# Altium PCB Mako DSP R2.0.PcbDoc (part 2 of 2)
Units mil, origin at the board's own origin, x right, y up, seen from the top; angles counter-clockwise.
Board outline 4440 x 2100 mil, 4 copper layers (Top Layer, GND, Power, Bottom Layer); 224 components, 235 nets, 988 pads, 314 vias.
Unrouted connection lines stored in the file: 159.
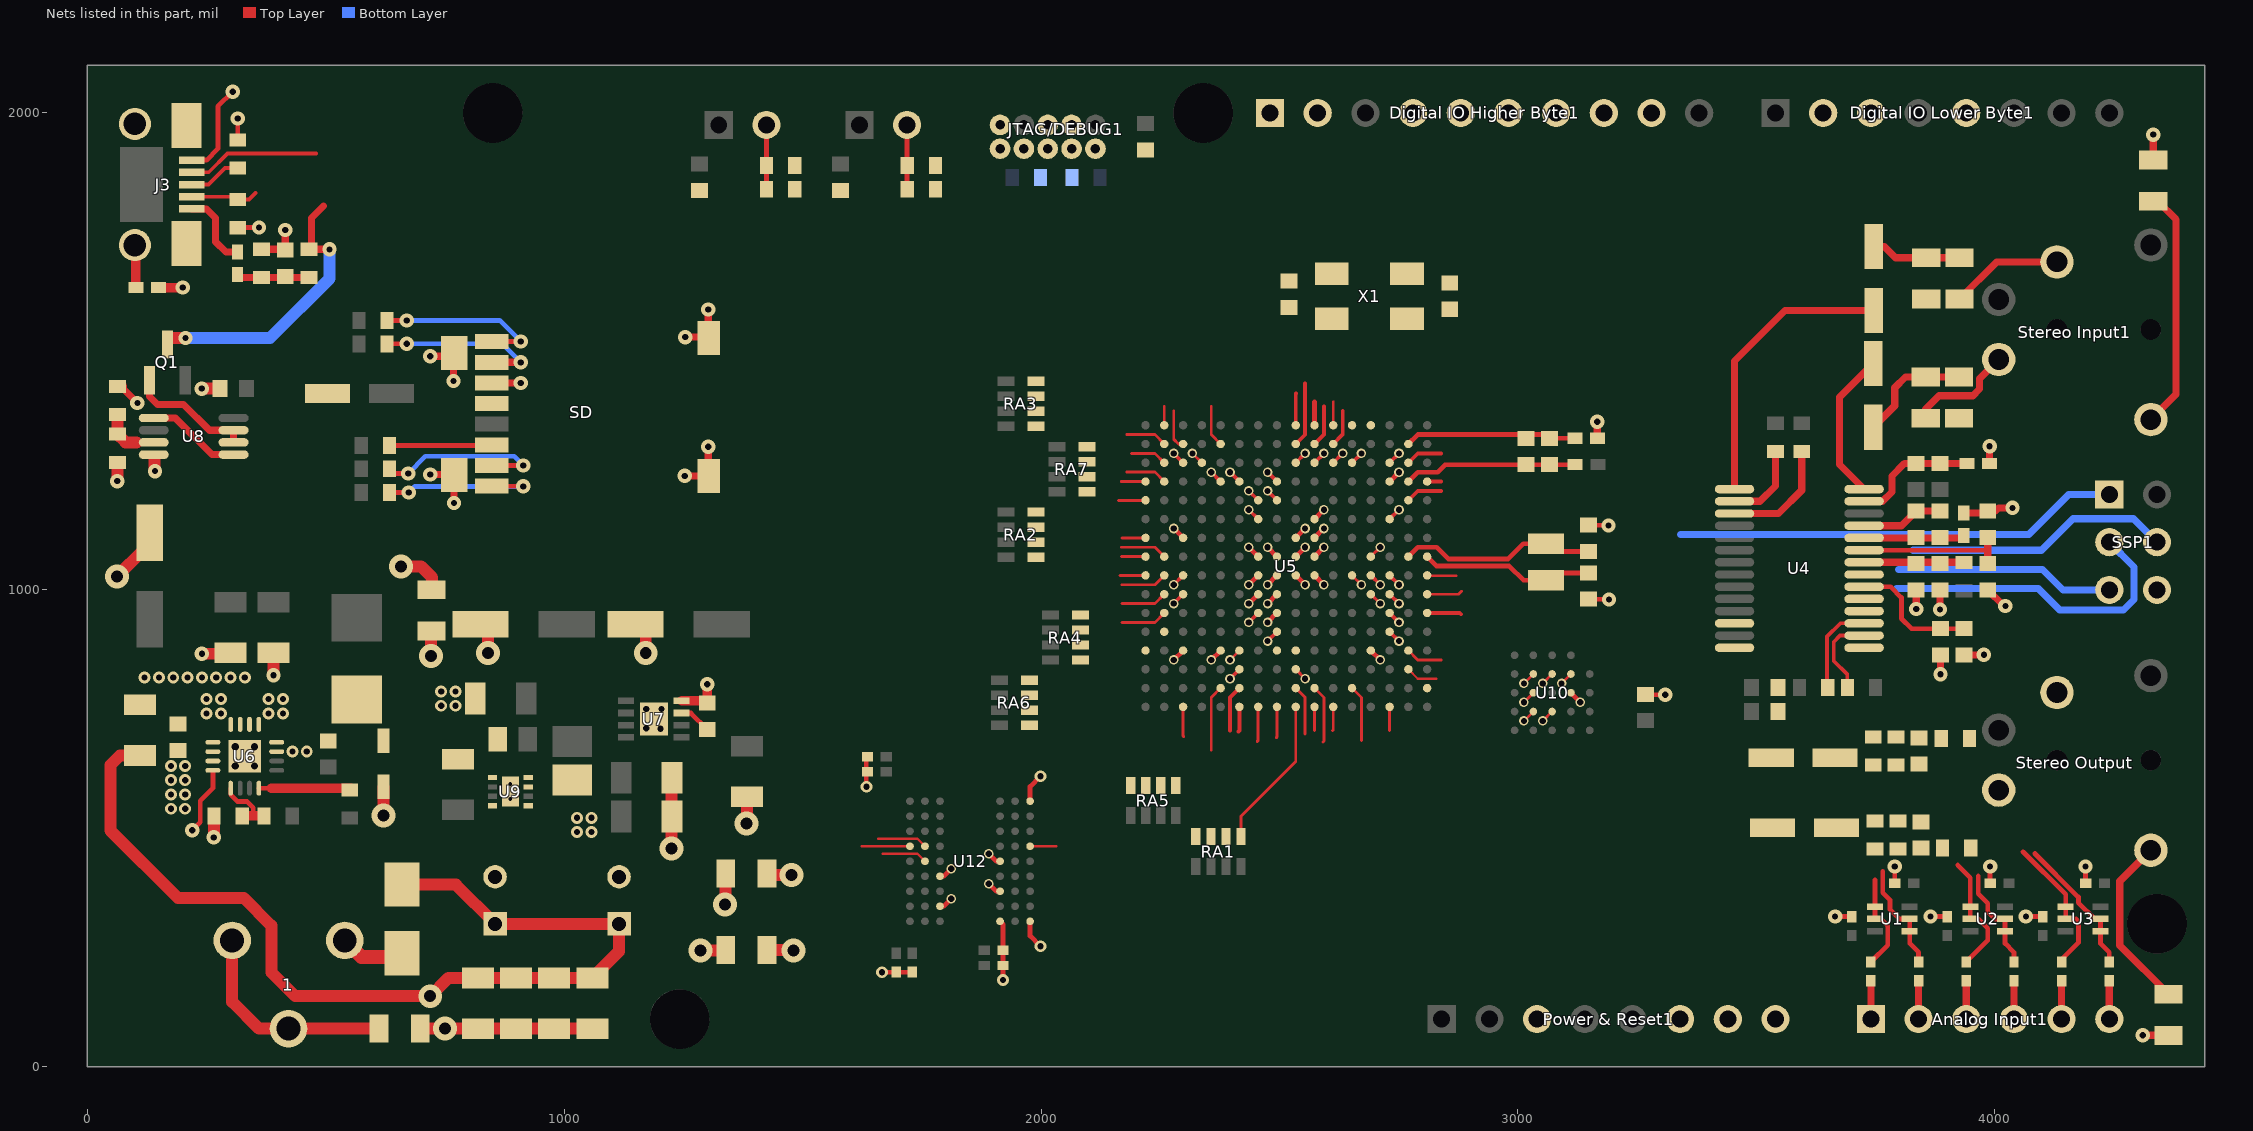
[diagram p4: the nets of this part, all layers, seen from the top]

## Via types
v1: diameter 20, hole 13, Top Layer to Bottom Layer, 165 vias
v2: diameter 30, hole 13, Top Layer to Bottom Layer, 70 vias
v3: diameter 25, hole 13, Top Layer to Bottom Layer, 48 vias
v4: diameter 50, hole 25, Top Layer to Bottom Layer, 20 vias
v5: diameter 19.68, hole 11.81, Top Layer to Bottom Layer, 5 vias
v6: diameter 25, hole 15, Top Layer to Bottom Layer, 4 vias
v7: diameter 19.68, hole 7.87, Top Layer to Bottom Layer, 2 vias

## Nets (pads, with @x,y where several pads share a name; then routed paths per layer and width w, separated by ;. In a path a pad name is that pad's centre, name@x,y a point inside that pad or via, vN(x,y) a via of type N, cw(c..) or ccw(c..) an arc to the next point about the centre after c; other vN are vias at no path point) (continued)
EMC_A0: RA1.1 U5.H16 | length 319.5
  Top Layer w6: RA1.1@2419.2,482.77 2419.2,525.2 2533.96,639.96 2533.96,680.31 U5.H16@2533.96,754.72
EMC_A1: RA1.2 U5.G16 | length 49.2
  Top Layer w6: 2573.33,705.51 U5.G16@2573.33,754.72
EMC_A2: RA1.3 U5.F16 | length 50.3
  Top Layer w6: 2611.28,705 2612.7,706.43 U5.F16@2612.7,754.72
EMC_A3: RA1.4 U5.E15 | length 117.7
  Top Layer w6: U5.E15@2652.07,794.09 2671.76,774.41 2671.76,684.52
EMC_A4: RA3.1 U5.C16 | length 49.2
  Top Layer w6: 2730.81,705.51 U5.C16@2730.81,754.72
EMC_A5: RA3.2 U5.P2 | length 82.8
  Top Layer w6: 2278.06,1374.8 2278.06,1315.75 2287.9,1305.91 U5.P2@2297.74,1305.91
EMC_A6: RA3.3 U5.R2 | length 86.9
  Top Layer w6: 2179.63,1325.59 2238.69,1325.59 U5.R2@2258.37,1305.91
EMC_A7: RA3.4 U5.R3 | length 77.1
  Top Layer w6: 2189.48,1286.22 2238.69,1286.22 U5.R3@2258.37,1266.54
EMC_A8: RA5.1 U5.J16 | length 65.3
  Top Layer w6: 2493.28,690 2494.59,691.32 U5.J16@2494.59,754.72
EMC_A9: RA5.2 U5.H14 | length 27.8
  Top Layer w6: U5.H14@2533.96,833.46 v1(2553.65,813.78)
EMC_A10: RA5.3 U5.K16 | length 74.5
  Top Layer w6: 2453.28,683 2453.28,682 2455.22,683.94 U5.K16@2455.22,754.72
EMC_A11: RA5.4 U5.M15 | length 137.8
  Top Layer w6: 2356.8,664.48 2356.8,774.41 U5.M15@2376.48,794.09
EMC_DQ0: RA2.8 U5.T5 | length 56.5
  Top Layer w6: 2162.48,1187.8 U5.T5@2219,1187.8
EMC_DQ1: RA2.6 U5.T7 | length 49.2
  Top Layer w6: 2169.79,1109.06 U5.T7@2219,1109.06
EMC_DQ2: RA2.5 U5.R8 | length 97.9
  Top Layer w6: 2168.65,1089.37 2238.69,1089.37 U5.R8@2258.37,1069.68
EMC_DQ3: RA2.7 U5.T9 | length 53.4
  Top Layer w6: 2165.59,1030.31 U5.T9@2219,1030.31
EMC_DQ4: RA4.8 U5.R9 | length 96.7
  Top Layer w6: 2169.79,1010.63 2238.69,1010.63 U5.R9@2258.37,1030.31
EMC_DQ5: RA4.6 U5.R10 | length 96.7
  Top Layer w6: 2169.79,971.26 2238.69,971.26 U5.R10@2258.37,990.94
EMC_DQ6: RA4.5 U5.R11 | length 96.7
  Top Layer w6: 2169.79,931.89 2238.69,931.89 U5.R11@2258.37,951.57
EMC_DQ7: RA4.7 U5.P9 | length 27.8
  Top Layer w8: v1(2278.06,1010.63) U5.P9@2297.74,1030.32
EMC_DQ8: RA6.8 U5.P10 | length 27.8
  Top Layer w8: v1(2278.06,971.26) U5.P10@2297.74,990.94
EMC_DQ9: RA6.6 U5.T13
EMC_DQ10: RA6.5 U5.R12
EMC_DQ11: RA6.7 U5.N3 | length 27.8
  Top Layer w6: v1(2317.43,1286.22) U5.N3@2337.11,1266.54
EMC_DQ12: RA7.8 U5.P3 | length 27.8
  Top Layer w8: v1(2278.06,1286.22) U5.P3@2297.74,1266.54
EMC_DQ13: RA7.6 U5.R4 | length 86.9
  Top Layer w6: 2179.63,1246.85 2238.69,1246.85 U5.R4@2258.37,1227.17
EMC_DQ14: RA7.5 U5.T8 | length 50
  Top Layer w6: 2168.96,1069.68 U5.T8@2219,1069.68
EMC_DQ15: RA7.7 U5.R1 | length 39.4
  Top Layer w6: U5.R1@2258.37,1345.28 2258.37,1384.65
FB: R9.1 R11.2 U6.5 | length 134.9
  Top Layer w10: U6.5@300.72,584.07 300.72,570.41 315.13,556 335.25,556 347.98,543.26 347.98,526
  Top Layer w20: R11.2@325.25,526 R9.1@370.72,526
GND: "Digital IO Higher Byte1.4" "Power & Reset1.6" "Power & Reset1.7" "USER STATUS.1" C1.1 C2.1 C3.1 C4.1 C5.1 C6.1 C7.1 C8.1 C9.1 C12.1 C13.1 C16.1 C17.1 C18.1 C19.1 C21.1 C23.1 C24.1 C25.1 C27.1 C28.1 C29.1 C30.2 C31.1 C32.2 C35.1 C36.1 C37.1 C38.1 C39.1 C40.1 C41.1 C42.1 C43.1 C44.1 C45.1 C46.1 C47.1 C48.1 C49.1 C50.1 C51.2 C52.2 C53.2 C54.1 C55.1 C56.2 C57.2 C58.2 C59.1 C60.1 C61.2 C62.1 C63.1 C64.2 C65.2 C66.1 C67.1 C68.1 C71.1 C72.1 C73.1 C74.1 C75.1 C78.1 C79.1 C80.1 C81.1 C82.1 C83.1 C84.1 C85.1 C86.1 C87.1 C88.1 C89.1 C90.1 C91.1 C92.1 C93.1 C94.1 C95.1 C96.1 C97.1 D1.1 FB3.2 FB4.2 FB6.1 FB8.1 FB8.2 FB9.1 FB9.2 FB11.1 FB11.2 FB12.2 FB13.2 FB14.2 FB15.2 FB16.1 FB17.2 J3.5 JTAG/DEBUG1.3 JTAG/DEBUG1.5 JTAG/DEBUG1.9 R8.1 R11.1 R14.1 R16.1 R20.1 R29.2 R31.2 R32.2 R33.2 R43.1 R44.1 R45.1 R47.1 R51.1 R52.2 R57.1 RESET1.2 SD.6 SD.9 SD.10 SD.11 SD.12 SSP1.6 STATUS.1 U4.12 U4.21 U5.C4 U5.D13 U5.G6 U5.G7 U5.G8 U5.G9 U5.H7 U5.H8 U5.H9 U5.J8 U5.J9 U5.J10 U5.J11 U5.K8 U5.K9 U5.K10 U5.M13 U5.P7 U5.P13 U6.4 U6.14 U6.15 U6.17 U7.4 U7.9 U8.4 U9.1 U9.4 U9.5 U9.9 U10.B3 U11.9 U12.A1 U12.A3 U12.B7 U12.C3 U12.D7 U12.E3 U12.J1 X1.2 X1.4 | length 4715
  Top Layer w10: J3.5@219.04,1901.18 250.22,1901.18 274.04,1925 274.04,2013.78 v2(305,2044.74) ; v2(220.25,496) 237,512.75 237,557.75 263.32,584.07 U6.4@263.32,621.47 ; R32.2@315.57,1943.54 v2(315.57,1988.46) ; R33.2@315.83,1759.74 v2(360,1759.74) ; C68.1@413.03,1714.27 C68.1@415,1712.3 ; v3(1633.63,587.25) 1633.63,647.94 C90.1@1635.94,650.25 ; v3(1666.63,198.25) 1729.31,198.25 C88.1@1729.63,198.57 ; U12.B7@1788.01,336.51 1795.88,336.51 v1(1811.63,352.26) ; U12.D7@1788.01,399.5 1795.88,399.5 v1(1811.63,415.25) ; v1(1890.37,383.76) 1906.12,368.01 U12.C3@1913.99,368.01 ; v1(1890.37,446.75) 1906.12,431 U12.E3@1913.99,431 ; U12.A3@1913.99,305.02 1920.31,298.69 C92.1@1920.31,244.25 v3(1920.31,181.94) ; U12.A1@1976.98,305.02 1976.98,274.39 v3(1998.63,252.75) ; U12.J1@1976.98,556.98 1976.98,587.61 v3(1998.63,609.25) ; v1(2278.06,853.15) U5.P13@2297.74,872.83 ; v1(2278.06,1128.74) U5.P7@2297.74,1109.06 ; v1(2356.8,853.15) U5.M13@2376.48,872.83 ; v1(2435.54,971.26) U5.K10@2455.22,990.94 ; v1(2435.54,1010.63) U5.K9@2455.22,1030.31 ; v1(2435.54,1089.37) U5.K8@2455.22,1069.68 ; v1(2474.91,931.89) U5.J11@2494.59,951.57 ; v1(2474.91,971.26) U5.J10@2494.59,990.94 ; v1(2474.91,1010.63) U5.J9@2494.59,1030.31 ; v1(2474.91,1089.37) U5.J8@2494.59,1069.68 ; U5.H9@2533.96,1030.31 v1(2553.65,1010.63) ; U5.H8@2533.96,1069.68 v1(2553.65,1089.37) ; U5.H7@2533.96,1109.06 v1(2553.65,1128.74) ; U5.G9@2573.33,1030.31 v1(2593.02,1010.63) ; U5.G8@2573.33,1069.68 v1(2593.02,1089.37) ; U5.G7@2573.33,1109.06 v1(2593.02,1128.74) ; U5.G6@2573.33,1148.43 v1(2593.02,1168.11) ; U5.D13@2691.44,872.83 v1(2711.13,853.15) ; U5.C4@2730.81,1227.17 v1(2750.5,1246.85) ; U10.B3@3110.99,784.21 v1(3130.68,764.53) ; C35.1@3147.7,980.44 v2@3190.26,980.44 ; C36.1@3147.7,1135.56 v2@3189.14,1135.56 ; C63.1@3267.62,780.77 3268.18,780.21 v2(3308.62,780.21) ; v2(3665,315) 3699.69,315 C2.1@3700,314.69 ; v2(3790,420) 3790,385.32 C1.1@3790.32,385 ; v2(3865,315) 3899.69,315 C4.1@3900,314.69 ; v2(3990,420) 3990,385.32 C3.1@3990.32,385 ; v2(4065,315) 4099.69,315 C6.1@4100,314.69 ; v2(4190,420) 4190,385.32 C5.1@4190.32,385
  Top Layer w15: R29.2@365,1714.27 C68.1@413.03,1714.27 ; C68.1@415,1712.3 v2(415,1754.74) ; v2(719,1242) 768.58,1242 769,1241.58 v2(769,1182) ; v2(719,1490) SD.12@762.58,1490 ; FB11.1@721,912.69 FB11.1@722,913.69 ; v2(768,1438) 768,1495.42 SD.12@769.54,1496.95 ; SD.6@848.28,1433.96 v2(909,1434) v2(909,1434) ; v2(1253,1239) 1302.92,1239 SD.9@1303,1239.08 1302,1240.08 v2(1302,1300) ; v2(1254,1530) SD.10@1301.45,1530 ; SD.10@1302,1529.45 v2(1302,1588) ; FB6.1@3166.32,1318 v2(3166.32,1352.38) ; v2(3835,960) C12.1@3835,1000 ; v2(3885,959) C13.1@3885,1000 ; v2(3886,823) C18.1@3886,863.44 ; C19.1@3935,863.44 3976.44,863.44 v2(3977,864) ; FB17.2@3935,1161.18 C16.1@3981.06,1161.18 ; C17.1@3985,1000 4019,966 v2(4022,966) ; C16.1@3985,1165.12 4001.12,1165.12 4008,1172 v2(4037,1172) ; FB13.2@3989,1265.38 v2(3989,1301) ; v2(4310,66) FB15.2@4363.69,66 ; FB14.2@4332,1901.31 v2(4332,1954.62)
  Top Layer w20: FB12.2@149.2,1634.02 v2(200,1634.02) ; U7.4@1246.07,767.39 1295.17,767.39 C97.1@1300,762.56 v2(1300,802)
  Top Layer w25: v4(62,1028) 119,1085 C66.1@119,1119.55 ; v2(63,1228) R20.1@63,1267.47 ; v2@141,1249.94 U8.4@141,1278 ; v2(240,1422) C65.2@278.44,1422 ; v2(240.25,866) 298.4,866 C53.2@300.25,867.85 ; v2(265.25,481) 265.72,481.47 R11.1@265.72,526 ; v2(390.25,821) C50.1@390.25,867.85 ; v4(621,527) D1.1@621,586.77 ; v4(658,1049) 700,1049 723,1026 FB11.2@723,1006 ; FB16.1@698.31,80 v4(750,80) 750.15,79.85 C74.1@819,79.85 C7.1@899,79.85 C72.1@979,79.85 C73.1@1059,79.85 C73.1@1059.85,79 ; v4(721,861) FB11.1@721,912.69 ; C61.2@788,927 C61.2@817.45,927 ; C61.2@824.45,928 840,912.45 v4(840,868) ; v4(1171,868) C58.2@1171,912.45 ; v4(1225,458) 1225,604.85 C56.2@1226.15,606 ; v4(1286,244) FB8.2@1337.69,244 ; v4(1337,340) 1338.69,341.69 FB9.2@1338.69,405 ; v4(1382,510) 1383,511 C57.2@1383,565.85 ; FB8.1@1425.31,245 v4@1480,245 ; FB9.1@1425.31,405 1428.31,402 v4(1477,402)
  Bottom Layer w15: R52.2@4842.9,502 v2(4842.9,541.47) ; v2(4851.43,346.91) C78.1@4890.9,346.91 ; C75.1@5129.34,345.47 v2(5170.9,345.47) ; R31.2@5175.9,503 v2(5175.9,542.47)
  other v2: 3190.7,980 3189.7,1135 142,1249
  other v3: 1027,492 1057,492 1027,522 1057,522 1202,709 1172,710 1172,750 1204,750 742,757 772,757 742,787 772,787 120.25,816 150.25,816 180.25,816 210.25,816 240.25,816 270.25,816 300.25,816 330.25,816
  other v4: 1481,244
  other v5: 4995.12,404.94 5022.68,404.94 5008.9,434.47 4995.12,464 5022.68,464
  other v6: 310.25,631 350.25,631 310.25,671 350.25,671
  other v7: 887,561.25 887,592.75
I2C_CLK: R1.1 U4.17 U5.L15 | length 294.1
  Top Layer w8: 2396.28,705 2396.28,774.52 U5.L15@2415.85,794.09 ; R1.1@3649.69,795.16 3648,796.84 3648,902 3675.84,929.84 U4.17@3725.83,929.84
I2C_DATA: R2.1 U4.16 U5.L16 | length 229.4
  Top Layer w8: 2414.28,703 2415.85,704.57 U5.L16@2415.85,754.72 ; R2.1@3690.63,795.16 3690.63,822.37 3662,851 3662,891 3675.25,904.25 U4.16@3725.83,904.25
LATCH_ENABLE: U4.15 U5.L14 | length 27.8
  Top Layer w8: v1(2396.17,813.78) U5.L14@2415.85,833.46
LDQM: U5.G15 U12.E8 | length 217.3
  Top Layer w5: 1667.75,446.75 1740.76,446.75 U12.E8@1756.51,431
  Top Layer w6: U5.G15@2573.33,794.09 2593.02,774.41 2593.02,682.74 2591.28,681
MODE: U4.14 U5.L13 | length 27.8
  Top Layer w6: v1(2396.17,853.15) U5.L13@2415.85,872.83
Net1_1: 1.1 D2.2 | length 139.9
  Top Layer w8: D2.2@646.85,230 D2.2@660,243.15
  Top Layer w30: 1.1@540,265 575,230 D2.2@646.85,230
Net1_2: 1.2 1.3 FB16.2 | length 460
  Top Layer w25: 1.2@303.78,265 303.78,136.22 360.04,79.96 1.3@421.89,79.96 FB16.2@611.69,80 FB16.2@611.69,80
"NetAnalog Input1_1": "Analog Input1.1" R34.1 | length 80.3
  Top Layer w15: 3740,100 R34.1@3740,180.32
"NetAnalog Input1_2": "Analog Input1.2" R35.1 | length 80.3
  Top Layer w15: 3840,100 R35.1@3840,180.32
"NetAnalog Input1_3": "Analog Input1.3" R36.1 | length 80.3
  Top Layer w15: 3940,100 R36.1@3940,180.32
"NetAnalog Input1_4": "Analog Input1.4" R37.1 | length 80.3
  Top Layer w15: 4040,100 R37.1@4040,180.32
"NetAnalog Input1_5": "Analog Input1.5" R38.1 | length 80.3
  Top Layer w15: 4140,100 R38.1@4140,180.32
"NetAnalog Input1_6": "Analog Input1.6" R39.1 | length 80.3
  Top Layer w15: 4240,100 R39.1@4240,180.32
"NetAux GPIO 0_1": "Aux GPIO 0.1"
"NetAux GPIO 0_2": "Aux GPIO 0.2"
"NetAux GPIO 0_3": "Aux GPIO 0.3"
"NetAux GPIO 0_4": "Aux GPIO 0.4"
"NetAux GPIO 0_5": "Aux GPIO 0.5"
"NetAux GPIO 0_6": "Aux GPIO 0.6"
"NetAux GPIO 0_7": "Aux GPIO 0.7"
"NetAux GPIO 0_8": "Aux GPIO 0.8"
"NetAux GPIO 0_9": "Aux GPIO 0.9"
"NetAux GPIO 0_10": "Aux GPIO 0.10"
"NetAux GPIO 1_1": "Aux GPIO 1.1"
"NetAux GPIO 1_2": "Aux GPIO 1.2"
"NetAux GPIO 1_3": "Aux GPIO 1.3"
"NetAux GPIO 1_4": "Aux GPIO 1.4"
"NetAux GPIO 1_5": "Aux GPIO 1.5"
"NetAux GPIO 1_6": "Aux GPIO 1.6"
"NetAux GPIO 1_7": "Aux GPIO 1.7"
"NetAux GPIO 1_8": "Aux GPIO 1.8"
"NetAux GPIO 1_9": "Aux GPIO 1.9"
"NetAux GPIO 1_10": "Aux GPIO 1.10"
NetC10_1: C10.1 C11.1 FB13.1 U4.27 | length 268.3
  Top Layer w15: U4.27@3725.83,1185.75 3764.34,1185.75 3784,1205.41 3784,1239 3810.16,1265.16 FB13.1@3941.54,1265.16
NetC12_2: C12.2 C13.2 R3.1 U4.22 | length 209.5
  Top Layer w10: R3.1@3934.29,1057.8 R3.1@3935,1057.09
  Top Layer w15: U4.22@3725.83,1057.8 R3.1@3934.29,1057.8
NetC14_1: C14.1 C15.1 FB17.1 U4.24 | length 211.2
  Top Layer w10: FB17.1@3930.04,1108.98 FB17.1@3935,1113.94
  Top Layer w15: U4.24@3725.83,1108.98 FB17.1@3930.04,1108.98
NetC14_2: C14.2 C15.2 U4.25 | length 171.8
  Top Layer w15: U4.25@3725.83,1134.57 3804.45,1134.57 C14.2@3835,1165.12 C15.2@3885,1165.12
NetC16_2: C16.2 C17.2 U4.23 | length 314.2
  Top Layer w10: U4.23@3725.83,1083.39 3725.96,1083.25 3984.75,1083.25 3985,1083
  Top Layer w15: C17.2@3985,1055.12 3985,1083 C16.2@3985,1110
NetC18_2: C18.2 C19.2 U4.20 | length 271.4
  Top Layer w10: U4.20@3725.83,1006.61 3781.39,1006.61 3804,984 3804,940 3825.44,918.56 C18.2@3886,918.56 C19.2@3935,918.56
NetC20_1: C20.1 U4.1 | length 604.5
  Top Layer w15: U4.1@3454.17,1211.34 3454.17,1480.17 3560.07,1586.07 C20.1@3746,1586.07
NetC20_2: C20.2 C21.2 R4.1 | length 189.8
  Top Layer w15: C20.2@3746,1719.93 3768.07,1719.93 3791.69,1696.31 C21.2@3856,1696.31 R4.1@3926,1696.31
NetC22_1: C22.1 U4.28 | length 314.5
  Top Layer w15: U4.28@3725.83,1211.34 3674,1263.16 3674,1403.93 C22.1@3745,1474.93
NetC22_2: C22.2 C23.2 R5.1 | length 245.8
  Top Layer w15: C22.2@3745,1341.07 3790,1386.07 3790,1424 3812.31,1446.31 R5.1@3855,1446.31 C23.2@3925,1446.31
NetC24_2: C24.2 FB2.2 U5.F3 | length 27.8
  Top Layer w8: U5.F3@2612.7,1266.54 v1(2632.39,1286.22)
NetC25_2: C25.2 FB1.2 U5.G3 | length 27.8
  Top Layer w8: U5.G3@2573.33,1266.54 v1(2593.02,1286.22)
NetC30_1: C30.1 U5.E1 X1.3
NetC31_2: C31.2 U5.D1 X1.1
NetC68_2: C68.2 FB10.1 R27.1 R29.1 | length 152.4
  Top Layer w10: FB10.1@315,1661.12 FB10.1@320.91,1655.21
  Top Layer w15: FB10.1@320.91,1655.21 R29.1@365,1655.21 R27.1@465,1655.21
NetC69_1: C69.1 U4.19
NetC69_2: C69.2 R49.2 R51.2
NetC70_1: C70.1 R46.2 R48.1 U11.1 | length 125.2
  Bottom Layer w10: U11.1@5065,464 5099.43,464 5127.9,492.47 R46.2@5127.9,503
  Bottom Layer w15: R46.2@5127.9,503 R48.1@5127.9,542.94
NetC70_2: C70.2 R49.1 R50.2
NetC75_2: C75.2 R50.1 U11.3 | length 53.7
  Bottom Layer w10: U11.3@5065,424.63 5086.74,424.63 5109.34,402.03
NetC76_1: C76.1 U4.18
NetC76_2: C76.2 R55.2 R57.2
NetC77_1: C77.1 R53.2 R54.1 U11.7 | length 136.4
  Bottom Layer w10: R54.1@4890.9,542.94 R53.2@4890.9,503 4918.9,475 4918.9,457.47 4932.06,444.32 U11.7@4952.8,444.32
NetC77_2: C77.2 R55.1 R56.2
NetC78_2: C78.2 R56.1 U11.5 | length 59
  Bottom Layer w10: C78.2@4893.81,404.94 U11.5@4952.8,404.94
NetC97_2: C97.2 U7.3 | length 68.2
  Top Layer w10: U7.3@1246.07,741.8 1265.65,741.8 C97.2@1300,707.44
NetDBGEN1_2: DBGEN1.2 R15.2 R16.2 | length 134.5
  Top Layer w10: R15.2@1719,1840.47 DBGEN1.2@1719,1975
NetFB3_1: FB3.1 U5.G1 | length 49.2
  Top Layer w10: U5.G1@2573.33,1345.28 2573.33,1394.49
NetFB4_1: FB4.1 U5.H3 | length 27.8
  Top Layer w8: U5.H3@2533.96,1266.54 v1(2553.65,1286.22)
NetFB10_2: FB10.2 J3.1 | length 162.7
  Top Layer w15: J3.1@219.04,1798.82 250.22,1798.82 269.04,1780 269.04,1730 290.68,1708.36 FB10.2@315,1708.36
NetFB12_1: FB12.1 J3.6 J3.7 J3.8 J3.9 | length 89.8
  Top Layer w8: J3.7@99.94,1723.03 J3.7@101.95,1721.02
  Top Layer w20: FB12.1@101.95,1634.02 J3.7@101.95,1721.02
NetFB14_1: "Stereo Input1.5" FB14.1 | length 505.5
  Top Layer w8: FB14.1@4332,1814.69 FB14.1@4342.31,1814.69
  Top Layer w15: 4327,1357.02 4380,1410.02 4380,1777 FB14.1@4342.31,1814.69
NetFB15_1: "Stereo Output.5" FB15.1 | length 370.9
  Top Layer w15: 4327,454.02 4262,389.02 4262,254.31 FB15.1@4364,152.31
NetJ3_4: J3.4 U5.H2 | length 411.7
  Top Layer w8: J3.4@219.04,1875.59 254.63,1875.59 294.04,1915 479.29,1915 ; U5.H2@2533.96,1305.91 2553.28,1325.22 2553.28,1433
NetL3_1: L3.1 U9.7
NetQ1_1: Q1.1 U8.6 U8.7 | length 265.1
  Top Layer w15: Q1.1@130.6,1439.6 130.6,1405.4 147,1389 202,1389 256.2,1334.8 U8.7@306.66,1334.8 U8.6@306.66,1309.2
NetQ1_3: Q1.3 R27.2 U5.F1 | length 643.2
  Top Layer w6: U5.F1@2612.7,1345.28 2612.7,1394.49
  Top Layer w15: R27.2@465,1714.27 R27.2@470,1714.27 ; 495,1805 470,1780 R27.2@470,1714.27 ; v2(508,1714) 507.73,1714.27 R27.2@470,1714.27
  Top Layer w25: Q1.3@171,1528 v2(206,1528)
  Bottom Layer w25: v2(206,1528) 383,1528 508,1653 v2(508,1714)
NetR4_2: "Stereo Input1.4" R4.2 | length 236.5
  Top Layer w15: R4.2@3926,1609.69 4004.04,1687.73 4130.15,1687.73
NetR5_2: "Stereo Input1.1" R5.2 | length 228.3
  Top Layer w15: R5.2@3855,1359.69 3855,1379 3883,1407 3954,1407 3968.03,1421.03 3968.03,1442.93 4008.1,1483.01
NetR6_2: R6.2 U4.2 U5.J13 | length 171.7
  Top Layer w15: U4.2@3454.17,1185.75 3507.75,1185.75 3540,1218 R6.2@3540,1290.47
NetR7_2: R7.2 U4.3 U5.H13 | length 242.5
  Top Layer w15: U4.3@3454.17,1160.16 3546.16,1160.16 3595,1209 R7.2@3595,1290.47
NetR8_2: R8.2 U5.H1 | length 66.9
  Top Layer w8: U5.H1@2533.96,1345.28 2533.96,1411.69 2534.28,1412
NetR13_2: R13.2 R14.2 TRST1.2 | length 135.2
  Top Layer w10: TRST1.2@1424,1975 1424,1840.47 R13.2@1424.47,1840
NetR15_1: R15.1 U5.L4 | length 27.8
  Top Layer w8: v1(2396.17,1246.85) U5.L4@2415.85,1227.17
NetR19_1: R19.1 R20.2 U8.3 | length 88.1
  Top Layer w25: R19.1@63,1367.47 R20.2@63,1326.53 80.32,1309.2 103,1309.2
NetR21_1: R21.1 U9.8
NetR22_1: R22.1 R43.2
NetR23_2: R23.2 STATUS.3
NetR24_1: R24.1 STATUS.4
NetR25_2: R25.2 STATUS.2
NetR26_2: "USER STATUS.3" R26.2
NetR28_1: "USER STATUS.4" R28.1
NetR30_2: "USER STATUS.2" R30.2
NetR31_1: R31.1 R46.1 U11.2 | length 111.1
  Bottom Layer w10: U11.2@5065,444.32 R46.1@5127.53,444.32
  Bottom Layer w15: R46.1@5127.53,444.32 R46.1@5127.9,443.94 R31.1@5175.9,443.94
NetR34_2: R34.2 U1.1 U1.2 U5.B3 | length 281.8
  Top Layer w8: U5.B3@2770.18,1266.54 2789.87,1286.22 2839.08,1286.22
  Top Layer w10: R34.2@3740,219.69 3775.32,255 3775.32,295.76 3761.07,310 U1.2@3748.58,310 U1.1@3748.58,335.59 3748.58,391.42
NetR35_2: R35.2 U1.4 U1.5 U5.A4 | length 263.5
  Top Layer w8: U5.A4@2809.55,1227.17 2839.08,1227.17
  Top Layer w10: 3765,410 3765,365 3780,350 3780,330 3800,310 U1.5@3821.42,310 U1.4@3821.42,284.41 3821.42,258.58 3840,240 R35.2@3840,219.69
NetR36_2: R36.2 U2.1 U2.2 U5.C3 | length 285.5
  Top Layer w8: U5.C3@2730.81,1266.54 v1(2750.5,1286.22) ; R36.2@3940,219.69 R36.2@3940,220
  Top Layer w10: 3922,423 3948.58,396.42 U2.1@3948.58,335.59 U2.2@3948.58,310 3965,310 3985,290 3985,265 R36.2@3940,220
NetR37_2: R37.2 U2.4 U2.5 U5.C6 | length 251.8
  Top Layer w8: U5.C6@2730.81,1148.43 v1(2750.5,1168.11)
  Top Layer w10: 3965,400 3965,362.8 3985,342.8 3985,325 4000,310 U2.5@4021.42,310 U2.4@4021.42,284.41 4021.42,258.58 4040,240 R37.2@4040,219.69
NetR38_2: R38.2 U3.1 U3.2 U5.E3 | length 334.5
  Top Layer w8: U5.E3@2652.07,1266.54 v1(2671.76,1286.22)
  Top Layer w10: 4059,451 4148.58,361.42 U3.1@4148.58,335.59 U3.2@4148.58,310 4170,310 4175.32,304.69 4175.32,260.32 4140,225 R38.2@4140,219.69
NetR39_2: R39.2 U3.4 U3.5 U5.B5 | length 376.3
  Top Layer w8: U5.B5@2770.18,1187.8 2789.87,1207.48 2839.08,1207.48
  Top Layer w10: 4084,447.21 4175.32,355.9 4175.32,343.93 4209.24,310 U3.5@4221.42,310 U3.4@4221.42,284.41 4221.42,258.58 4240,240 R39.2@4240,219.69
NetR40_1: R40.1 R44.2
NetR41_1: R41.1 R45.2
NetR42_1: R42.1 R47.2
NetR48_2: "Stereo Output.1" R48.2
NetR52_1: R52.1 R53.1 U11.6 | length 118.3
  Bottom Layer w10: R52.1@4842.9,442.94 4843.9,443.94 R53.1@4890.9,443.94 4900.43,443.94 4919.74,424.63 U11.6@4952.8,424.63
NetR54_2: "Stereo Output.4" R54.2
NetR58_1: R58.1 SD.1 | length 351.8
  Top Layer w10: R58.1@633.53,1204 v2(674,1204) ; SD.1@848.28,1217.43 913.57,1217.43 v2(914,1217)
  Bottom Layer w10: v2(674,1204) 687,1217 v2(914,1217)
NetR59_1: R59.1 SD.2 | length 377.6
  Top Layer w10: R59.1@633.53,1254 633.53,1246.47 636,1244 v2(673,1244) ; SD.2@848.28,1260.73 913.73,1260.73 v2(914,1261)
  Bottom Layer w10: v2(673,1244) 709,1280 895,1280 v2(914,1261)
NetR62_1: R62.1 SD.8 | length 359.6
  Top Layer w10: R62.1@628.53,1565 v2(670,1565) ; SD.8@848.28,1520.57 908.57,1520.57 v2(909,1521)
  Bottom Layer w10: v2(670,1565) 865,1565 v2(909,1521)
NetRTCALARM1_1: RTCALARM1.1 U5.A11 | length 71.8
  Top Layer w8: U5.A11@2809.55,951.57 2877.7,951.57 2880.28,949
NetU5_A9: U5.A9 WAKEUP0.1 | length 60.6
  Top Layer w6: U5.A9@2809.55,1030.31 2810.37,1029.5 2869.78,1029.5
NetU5_A10: U5.A10 WAKEUP1.1 | length 74.2
  Top Layer w6: U5.A10@2809.55,990.94 2875.22,990.94 2881.28,997
NetU5_A15: U5.A15 U10.D4 | length 27.8
  Top Layer w6: v1(3012.57,725.16) U10.D4@3032.25,744.84
NetU5_B13: U5.B13 U10.D2 | length 104.9
  Top Layer w6: U5.B13@2770.18,872.83 2789.87,853.15 2839.08,853.15 ; v1(3012.57,803.9) U10.D2@3032.25,823.58
NetU5_B14: U5.B14 U10.B2 | length 95
  Top Layer w5: U5.B14@2770.18,833.46 2789.87,813.78 2829.24,813.78 ; v1(3091.31,803.9) U10.B2@3110.99,823.58
NetU5_C9: U5.C9 WAKEUP2.1 | length 27.8
  Top Layer w8: U5.C9@2730.81,1030.32 v1(2750.5,1010.63)
NetU5_C10: U5.C10 U10.C2 | length 55.7
  Top Layer w6: v1(3051.94,803.9) U10.C2@3071.62,823.58
  Top Layer w8: U5.C10@2730.81,990.94 v1(2750.5,971.26)
NetU5_C11: U5.C11 U10.D3 | length 55.7
  Top Layer w6: v1(3012.57,764.53) U10.D3@3032.25,784.21
  Top Layer w8: U5.C11@2730.81,951.57 v1(2750.5,931.89)
NetU5_C12: U5.C12 U10.C4 | length 55.7
  Top Layer w6: v1(3051.94,725.16) U10.C4@3071.62,744.84
  Top Layer w8: U5.C12@2730.81,912.2 v1(2750.5,892.52)
NetU5_D8: U5.D8 WAKEUP3.1 | length 27.8
  Top Layer w6: U5.D8@2691.44,1069.68 v1(2711.13,1089.37)
NetU8_1: U8.1 U8.5 | length 199.1
  Top Layer w15: U8.1@139.34,1360.39 184.61,1360.39 261.39,1283.61 U8.5@306.66,1283.61
PG: R10.2 U6.8 | length 194
  Top Layer w10: U6.8@359.77,584.07 385.25,584.07
  Top Layer w20: 385.25,584.07 R10.2@553.79,584.07
PWM_3: "Digital IO Lower Byte1.5"
PWM_5: "Digital IO Lower Byte1.3"
PWM_6: "Digital IO Lower Byte1.2"
PWM_9: "Digital IO Higher Byte1.9"
PWM_10: "Digital IO Higher Byte1.8"
PWM_11: "Digital IO Higher Byte1.7"
PWM_12: "Digital IO Higher Byte1.6"
PWM_13: "Digital IO Higher Byte1.5"
RAS#: U5.P16 U12.F8 | length 168.2
  Top Layer w5: 1658.24,478.24 1740.76,478.24 U12.F8@1756.51,462.5
  Top Layer w6: U5.P16@2297.74,754.72 2297.74,693.54 2299.28,692
RESET: "Power & Reset1.3" C29.2 JTAG/DEBUG1.10 R12.1 RESET1.1 U5.D9 | length 27.8
  Top Layer w8: U5.D9@2691.44,1030.31 v1(2711.13,1010.63)
RTCX1: C35.2 U5.A8 X2.1 | length 342.4
  Top Layer w10: U5.A8@2809.55,1069.68 2829.24,1050 2981.7,1050 3011.7,1020 X2.1@3058.7,1020 ; X2.1@3075.03,1035.56 C35.2@3147.7,1035.56
RTCX2: C36.2 U5.B8 X2.2 | length 392.6
  Top Layer w10: U5.B8@2770.18,1069.68 2789.87,1089.37 2829.24,1089.37 2853.61,1065 2979.7,1065 3011.47,1096.77 X2.2@3058.7,1096.77 ; X2.2@3075.03,1080.44 C36.2@3147.7,1080.44
SHIELD_SCL: "Digital IO Higher Byte1.1" U5.K11 | length 27.8
  Top Layer w8: v1(2435.54,931.89) U5.K11@2455.22,951.57
SHIELD_SDA: "Digital IO Higher Byte1.2" U5.J12 | length 27.8
  Top Layer w8: v1(2474.91,892.52) U5.J12@2494.59,912.2
SSP_CS: SSP1.5 U5.E9 | length 487.6
  Top Layer w6: U5.E9@2652.07,1030.31 v1(2671.76,1010.63)
  Bottom Layer w15: 3798,1043 4100,1043 4143,1000 SSP1.5@4240,1000
SSP_MISO: R61.1 SD.7 SSP1.1 | length 1291.3
  Top Layer w10: R61.1@628.53,1516 v2(670,1516)
  Top Layer w15: SD.7@848.28,1477.27 908.73,1477.27 v2(909,1477)
  Bottom Layer w10: v2(670,1516) 870,1516 v2(909,1477)
  Bottom Layer w15: 3341,1116 4071,1116 4155,1200 SSP1.1@4240,1200
SSP_MOSI: R60.1 SD.3 SSP1.4 U5.M2 | length 860.7
  Top Layer w6: 2356.8,1384.65 2356.8,1325.59 U5.M2@2376.48,1305.91
  Top Layer w10: R60.1@633.53,1303 SD.3@847.24,1303
  Top Layer w15: SD.3@847.24,1303 SD.3@848.28,1304.04
  Bottom Layer w15: 3829,1083 4098,1083 4164,1149 4291,1149 SSP1.4@4340,1100
SSP_SCK: SD.5 SSP1.3 U5.D10 | length 695.2
  Top Layer w6: U5.D10@2691.44,990.94 v1(2711.13,971.26)
  Bottom Layer w15: 3794,1003 4091,1003 4136.03,957.97 4269.97,957.97 4292,980 4292,1048 SSP1.3@4240,1100
STATUS_BLUE: R24.2
STATUS_GREEN: R23.1
STATUS_RED: R25.1
SW: C26.1 D1.2 L1.1 U6.1 U6.12 U6.13 U6.16
  other v3: 250.25,741 280.25,741 380.25,741 410.25,741 250.25,771 280.25,771 380.25,771 410.25,771
TCK/SWDCLK: JTAG/DEBUG1.4 R18.1 U5.J5 | length 27.8
  Top Layer w8: v1(2474.91,1207.48) U5.J5@2494.59,1187.8
TDI: JTAG/DEBUG1.8 U5.J4 | length 27.8
  Top Layer w8: v1(2474.91,1246.85) U5.J4@2494.59,1227.17
TDO/SWO: JTAG/DEBUG1.6 R17.1 U5.K5 | length 27.8
  Top Layer w8: v1(2435.54,1207.48) U5.K5@2455.22,1187.8
TMS/SWDIO: JTAG/DEBUG1.2 U5.K6 | length 27.8
  Top Layer w8: v1(2435.54,1168.11) U5.K6@2455.22,1148.43
TRST: R13.1 U5.M4 | length 27.8
  Top Layer w8: v1(2356.8,1246.85) U5.M4@2376.48,1227.17
UDQM: U5.H15 U12.F1 | length 159.2
  Top Layer w5: U12.F1@1976.98,462.5 2032.1,462.5
  Top Layer w6: U5.H15@2533.96,794.09 2553.28,774.78 2553.28,698
USB0_N: J3.2 R33.1 U5.G2 | length 228.4
  Top Layer w8: J3.2@219.04,1824.41 309.71,1824.41 R33.1@315.58,1818.54 339.04,1818.54 352.5,1832 ; U5.G2@2573.33,1305.91 2593.02,1325.59 2593.02,1384.65
USB0_P: J3.3 R32.1 U5.F2 | length 187.9
  Top Layer w8: J3.3@219.04,1850 254.04,1850 288.53,1884.49 R32.1@315.57,1884.49 ; U5.F2@2612.7,1305.91 2632.39,1325.59 2632.39,1374.8
USER_STATUS_BLUE: R28.2
USER_STATUS_GREEN: R26.1
USER_STATUS_RED: R30.1
VDDA: C33.2 C34.2 FB5.2 U5.B4 | length 363.9
  Top Layer w10: U5.B4@2770.18,1227.17 2789.87,1246.85 2831.55,1246.85 2847.14,1262.44 C34.2@3016.7,1262.44 C33.2@3065.7,1262.44 FB5.2@3119.51,1262.44
VIN: "Power & Reset1.8" C7.2 C51.1 C52.1 C54.2 C55.2 C72.2 C73.2 C74.2 D2.1 R19.2 U6.2 U6.3 U6.11 | length 2117
  Top Layer w15: R19.2@70.47,1426.53 v2(105,1392)
  Top Layer w25: R19.2@63,1426.53 R19.2@70.47,1426.53 ; C55.2@110.25,652.85 68.85,652.85 48.5,632.5 48.5,495.5 190,354 328,354 386,296 386,198 436,148 v4(719,148) 757.15,186.15 C74.2@819,186.15 C7.2@899,186.15 C72.2@979,186.15 C73.2@1059,186.15 1115,242.15 C51.1@1115,299.79 C52.1@855,299.79 772.94,381.85 D2.1@660,381.85
  other v3: 175.25,541 205.25,541 175.25,571 205.25,571 175.25,601 205.25,601 175.25,631 205.25,631 430.25,660.84 460.25,661
VSSA: C33.1 C34.1 FB6.2 U5.B2 | length 349.2
  Top Layer w6: C33.1@3065.7,1317.56 C33.1@3066.14,1318
  Top Layer w10: U5.B2@2770.18,1305.91 2789.87,1325.59 C33.1@3057.66,1325.59 ; C33.1@3066.14,1318 FB6.2@3119.07,1318
WE#: U5.T4 U12.F9 | length 152.4
  Top Layer w5: 1623.5,462.5 U12.F9@1725.02,462.5
  Top Layer w6: 2168.11,1227.17 U5.T4@2219,1227.17
pads on no net: "Power & Reset1.1" "Stereo Input1.3" "Stereo Input1.6" "Stereo Input1." "Stereo Output.3" "Stereo Output.6" "Stereo Output." J3.GND JTAG/DEBUG1.1@2189.59,2006.5 JTAG/DEBUG1.7 U5.A1 U5.A2 U5.A3 U5.A5 U5.A6 U5.A7 U5.A12 U5.A13 U5.A14 U5.A16 U5.B1 U5.B6 U5.B7 U5.B9 U5.B11 U5.B12 U5.B15 U5.B16 U5.C1 U5.C2 U5.C5 U5.C7 U5.C8 U5.C13 U5.C15 U5.D2 U5.D3 U5.D4 U5.D5 U5.D6 U5.D11 U5.D12 U5.D15 U5.D16 U5.E2 U5.E4 U5.E5 U5.E6 U5.E7 U5.E8 U5.E10 U5.E11 U5.E13 U5.E14 U5.E16 U5.F4 U5.F5 U5.F6 U5.F12 U5.F14 U5.F15 U5.G4 U5.G5 U5.G12 U5.G13 U5.G14 U5.H5 U5.H6 U5.H11 U5.J1 U5.J2 U5.J3 U5.J14 U5.J15 U5.K1 U5.K2 U5.K3 U5.K4 U5.K12 U5.K13 U5.K14 U5.K15 U5.L1 U5.L2 U5.L3 U5.L5 U5.L6 U5.L11 U5.L12 U5.M1 U5.M3 U5.M5 U5.M6 U5.M7 U5.M8 U5.M9 U5.M10 U5.M12 U5.M14 U5.M16 U5.N1 U5.N2 U5.N4 U5.N5 U5.N6 U5.N9 U5.N10 U5.N12 U5.N14 U5.N15 U5.N16 U5.P1 U5.P4 U5.P5 U5.P6 U5.P8 U5.P11 U5.P12 U5.P14 U5.R6 U5.R7 U5.R13 U5.R14 U5.R15 U5.T1 U5.T2 U5.T3 U5.T6 U5.T11 U5.T12 U5.T14 U5.T15 U5.T16 U6.6 U6.7 U6.9 U7.2 U7.6 U7.7 U10.A2 U10.A3 U10.A4 U10.A5 U10.B1 U10.B5 U10.C1 U10.C3 U10.C5 U10.D1 U10.D5 U10.E1 U10.E2 U10.E3 U10.E4 U10.E5 U12.E2 U12.G1
copper on no net: | length 0
  other v1: 2278.06,813.78 2317.43,813.78 2356.8,813.78 2435.54,813.78 2474.91,813.78 2593.02,813.78 2632.39,813.78 2671.76,813.78 2435.54,853.15 2474.91,853.15 2553.65,853.15 2593.02,853.15 2671.76,853.15 2750.5,853.15 2278.06,892.52 2317.43,892.52 2356.8,892.52 2396.17,892.52 2435.54,892.52 2593.02,892.52 2632.39,892.52 2711.13,892.52 2278.06,931.89 2396.17,931.89 2553.65,931.89 2671.76,931.89 2711.13,931.89 2317.43,971.26 2356.8,971.26 2671.76,971.26 2317.43,1010.63 2356.8,1010.63 2278.06,1089.37 2356.8,1089.37 2671.76,1089.37 2750.5,1089.37 2356.8,1128.74 2671.76,1128.74 2750.5,1128.74 2278.06,1168.11 2317.43,1168.11 2356.8,1168.11 2396.17,1168.11 2553.65,1168.11 2632.39,1168.11 2671.76,1168.11 2711.13,1168.11 2278.06,1207.48 2317.43,1207.48 2356.8,1207.48 2396.17,1207.48 2553.65,1207.48 2593.02,1207.48 2632.39,1207.48 2671.76,1207.48 2711.13,1207.48 2750.5,1207.48 2278.06,1246.85 2317.43,1246.85 2435.54,1246.85 2593.02,1246.85 2632.39,1246.85 2671.76,1246.85 2711.13,1246.85 2356.8,1286.22 2396.17,1286.22 2435.54,1286.22 2474.91,1286.22 2711.13,1286.22

## Polygon pours and split planes (outlines as drawn)
AVDD on Top Layer "Mechanical 15-No Net" (solid, remove dead copper, pour order 27): 1220,705 1220,650 1367,650 1367,695 1340,695 1325,680 1271,680 1269,682 1269,705
SW on Top Layer "Mechanical 15-No Net" (solid, pour order 22): 355.25,676 355.25,736 365.25,736 365.25,791 510.25,791 510.25,821 620.25,821 620,713 651,713 651,652 621,652 621,666 480.25,666 480.25,686 420.25,686 420.25,676
DVDD on Top Layer "Power Plane-No Net" (solid, remove dead copper, pour order 31): 889,811 889,723 897,723 897,657 972,657 972,646 1063,646 1063,959 943,959 943,811
5VCC on Top Layer "Power Plane-No Net" (solid, remove dead copper, pour order 29): 739,569 739,500 831,500 831,563 862,563 862,594 819,594 819,576 812,569
GND on Top Layer "Top Layer-No Net" (solid, remove dead copper, pour order 30): 742,622 819,622 819,601 857.49,601 858,601.51 858,613 838,613 835,616 835,732 836,733 836,807 722,807 722,745 742,725
GND on Top Layer "Power Plane-No Net" (solid, remove dead copper, pour order 32): 858,613 858,556 838,556 838,474 1077,474 1077,542 910,542 910,613
NetL3_1 on Top Layer "Power Plane-No Net" (solid, remove dead copper, pour order 34): 1063,635 1063,552 947,552 947,572 907,572 907,600 948,600 948,635
NetR21_1 on Top Layer "Power Plane-No Net" (solid, remove dead copper, pour order 33): 897,722 832,722 832,627 867,627 867,597 942,597 942,657 897,657 897,722
5VCC on Top Layer "Mechanical 15-No Net" (solid, pour order 26): 262.75,1011 262.75,941 442.75,941 447.75,941 452.75,936 452.75,891 682.75,891 682.75,1011
VIN on Top Layer "Mechanical 15-No Net" (solid, remove dead copper, pour order 21): 375.25,671 375.25,651 410.25,651 410.25,641 475.25,641 475.25,681 410.25,681 410.25,671
GND on Top Layer "Mechanical 15-No Net" (solid, pour order 24): 315.25,691 345.25,691 345.25,831 70.25,831 70.25,736 160.25,736 160.25,701 225.25,701 225.25,796 315.25,796
SW on Top Layer "Mechanical 15-No Net" (solid, pour order 23): 230.25,676 295.25,676 295.25,691 305.25,691 305.25,791 230.25,791
VIN on Top Layer "Mechanical 15-No Net" (solid, pour order 20): 285.25,666 285.25,636 225.25,636 225.25,526 75.25,526 75.25,691 160.25,691 160.25,681 225.25,681 225.25,666
NetFB12_1 on Top Layer "Power Plane-No Net" (solid, remove dead copper, pour order 28): 59.04,1675 59.04,2025 244.04,2025 244.04,1675
5VCC on Top Layer "Mechanical 15-No Net" (solid, pour order 25): 1156,752 1156,806 1155,805 1084,804 1084,482 1151,482 1151,703 1109,703 1107,705 1107,749 1110,752
VIN on Bottom Layer "Mechanical 15-No Net" (solid, pour order 18): 160.25,649.21 220.25,649.21 220.25,601 410.25,601 410.25,676 475.25,676 475.25,526 160.25,526
SW on Bottom Layer "Mechanical 15-No Net" (solid, pour order 19): 430.25,711 230.25,711 230.25,791 430.25,791
GND on GND (split plane): 337.4,948.4 339.05,947.29 341,946.9 1289.89,946.9 1419.9,816.89 1419.9,20.1 20.1,20.1 20.1,1084.9 200.89,1084.9
GND on GND (split plane): 4419.9,20.1 1430.1,20.1 1430.1,819 1429.71,820.95 1428.6,822.6 1295.6,955.6 1293.95,956.71 1292,957.1 343.11,957.1 206.6,1093.6 204.95,1094.71 203,1095.1 20.1,1095.1 20.1,2079.9 3584.9,2079.9 3584.9,652.11 3491.4,558.6 3490.29,556.95 3489.9,555 3489.9,179 3490.29,177.05 3491.4,175.4 3493.05,174.29 3495,173.9 3496.95,174.29 3498.6,175.4 3499.71,177.05 3500.1,179 3500.1,552.89 3593.6,646.4 3594.71,648.05 3595.1,650 3595.1,2079.9 4419.9,2079.9
DVDD on Power (split plane): 2118.39,2004.98 2123.02,2003.86 2127.42,2002.04 2131.48,1999.55 2135.1,1996.46 2138.2,1992.84 2140.69,1988.78 2142.51,1984.38 2143.62,1979.75 2143.99,1975 2143.62,1970.25 2142.51,1965.62 2140.69,1961.22 2138.2,1957.16 2135.1,1953.54 2131.48,1950.45 2127.42,1947.96 2123.02,1946.14 2118.39,1945.02 2113.64,1944.65 2108.9,1945.02 2104.27,1946.14 2099.87,1947.96 2095.81,1950.45 2092.18,1953.54 2089.09,1957.16 2086.6,1961.22 2084.78,1965.62 2083.67,1970.25 2083.3,1975 2083.67,1979.75 2084.78,1984.38 2086.6,1988.78 2089.09,1992.84 2092.18,1996.46 2095.81,1999.55 2099.87,2002.04 2104.27,2003.86 2108.9,2004.98 2113.64,2005.35
no net on Power (split plane): 1149.9,264.1 1080.1,264.1 1080.1,333.9 1149.9,333.9
no net on Power (split plane): 971.2,564.85 975.5,563.82 979.59,562.13 983.36,559.82 986.73,556.94 989.6,553.58 991.91,549.8 993.61,545.71 994.64,541.41 994.99,537 994.64,532.59 993.61,528.29 991.91,524.2 989.6,520.42 986.73,517.06 983.36,514.18 979.59,511.87 975.5,510.18 971.2,509.15 966.79,508.8 962.37,509.15 958.07,510.18 953.98,511.87 950.21,514.18 946.84,517.06 943.97,520.42 941.66,524.2 939.96,528.29 938.93,532.59 938.58,537 938.93,541.41 939.96,545.71 941.66,549.8 943.97,553.58 946.84,556.94 950.21,559.82 953.98,562.13 958.07,563.82 962.37,564.85 966.79,565.2
AVDD on Power (split plane): 4419.9,20.1 1194.1,20.1 1194.1,365.9 1271,365.9 1272.95,366.29 1274.6,367.4 1275.71,369.05 1276.1,371 1276.1,717 1276.1,1030.9 1373.9,1030.9 1373.9,757 1373.9,312 1374.29,310.05 1375.4,308.4 1532.4,151.4 1534.05,150.29 1536,149.9 3295,149.9 3296.95,150.29 3298.6,151.4 3394.6,247.4 3458.6,311.4 3459.71,313.05 3460.1,315 3460.1,643.89 3594.6,778.4 3595.71,780.05 3596.1,782 3596.1,916 3596.1,1252.89 3628.6,1285.4 3629.71,1287.05 3630.1,1289 3630.1,1999.89 3710.11,2079.9 4419.9,2079.9
no net on Power (split plane): 3444.88,137.09 3449.68,136.13 3454.31,134.56 3458.7,132.39 3462.77,129.68 3466.45,126.45 3469.68,122.77 3472.4,118.7 3474.56,114.31 3476.13,109.68 3477.09,104.88 3477.41,100 3477.09,95.12 3476.13,90.32 3474.56,85.69 3472.4,81.3 3469.68,77.23 3466.45,73.55 3462.77,70.32 3458.7,67.61 3454.31,65.44 3449.68,63.87 3444.88,62.91 3440,62.59 3435.12,62.91 3430.32,63.87 3425.69,65.44 3421.3,67.61 3417.23,70.32 3413.55,73.55 3410.32,77.23 3407.6,81.3 3405.44,85.69 3403.87,90.32 3402.91,95.12 3402.59,100 3402.91,104.88 3403.87,109.68 3405.44,114.31 3407.6,118.7 3410.32,122.77 3413.55,126.45 3417.23,129.68 3421.3,132.39 3425.69,134.56 3430.32,136.13 3435.12,137.09 3440,137.41
no net on Power (split plane): 3344.96,137.67 3349.83,136.7 3354.54,135.1 3359,132.9 3363.13,130.14 3366.86,126.87 3370.14,123.13 3372.9,119 3375.1,114.54 3376.7,109.83 3377.67,104.96 3377.99,100 3377.67,95.04 3376.7,90.17 3375.1,85.46 3372.9,81 3370.14,76.87 3366.86,73.13 3363.13,69.86 3359,67.1 3354.54,64.9 3349.83,63.3 3344.96,62.33 3340,62.01 3335.04,62.33 3330.17,63.3 3325.46,64.9 3321,67.1 3316.87,69.86 3313.14,73.13 3309.86,76.87 3307.1,81 3304.9,85.46 3303.3,90.17 3302.33,95.04 3302.01,100 3302.33,104.96 3303.3,109.83 3304.9,114.54 3307.1,119 3309.86,123.13 3313.14,126.87 3316.87,130.14 3321,132.9 3325.46,135.1 3330.17,136.7 3335.04,137.67 3340,137.99
5VCC on Power (split plane): 426.9,940 427.29,938.05 428.4,936.4 729.9,634.89 729.9,376.1 20.1,376.1 20.1,1464.9 426.9,1464.9
no net on Power (split plane): 971.47,789.05 976.27,787.9 980.83,786.01 985.04,783.44 988.79,780.23 991.99,776.48 994.57,772.27 996.46,767.72 997.61,762.92 998,758 997.61,753.08 996.46,748.28 994.57,743.73 991.99,739.52 988.79,735.77 985.04,732.56 980.83,729.99 976.27,728.1 971.47,726.95 966.56,726.56 961.64,726.95 956.84,728.1 952.28,729.99 948.07,732.56 944.32,735.77 941.12,739.52 938.54,743.73 936.65,748.28 935.5,753.08 935.11,758 935.5,762.92 936.65,767.72 938.54,772.27 941.12,776.48 944.32,780.23 948.07,783.44 952.28,786.01 956.84,787.9 961.64,789.05 966.56,789.44
no net on Power (split plane): 504.45,549.33 508.75,548.29 512.84,546.6 516.61,544.29 519.97,541.41 522.85,538.05 525.16,534.28 526.85,530.19 527.89,525.88 528.23,521.47 527.89,517.06 526.85,512.76 525.16,508.67 522.85,504.9 519.97,501.53 516.61,498.66 512.84,496.34 508.75,494.65 504.45,493.62 500.03,493.27 495.62,493.62 491.32,494.65 487.23,496.34 483.46,498.66 480.09,501.53 477.22,504.9 474.91,508.67 473.21,512.76 472.18,517.06 471.83,521.47 472.18,525.88 473.21,530.19 474.91,534.28 477.22,538.05 480.09,541.41 483.46,544.29 487.23,546.6 491.32,548.29 495.62,549.33 500.03,549.67
DVDD on Power (split plane): 3621.4,2005.6 3620.29,2003.95 3619.9,2002 3619.9,1291.11 3587.4,1258.6 3586.29,1256.95 3585.9,1255 3585.9,916 3585.9,784.11 3451.4,649.6 3450.29,647.95 3449.9,646 3449.9,317.11 3387.4,254.6 3292.89,160.1 1538.11,160.1 1384.1,314.11 1384.1,757 1384.1,1036 1383.71,1037.95 1382.6,1039.6 1380.95,1040.71 1379,1041.1 1271,1041.1 1269.05,1040.71 1267.4,1039.6 1266.29,1037.95 1265.9,1036 1265.9,717 1265.9,376.1 740.1,376.1 740.1,637 739.71,638.95 738.6,640.6 437.1,942.11 437.1,1470 436.71,1471.95 435.6,1473.6 433.95,1474.71 432,1475.1 20.1,1475.1 20.1,2079.9 3695.69,2079.9
VIN on Power (split plane): 1183.9,20.1 20.1,20.1 20.1,365.9 1183.9,365.9
no net on Power (split plane): 889.9,264.1 820.1,264.1 820.1,333.9 889.9,333.9

## Keep-outs
Keep-Out Layer:
  lines w10: 25,25 25,2075 4415,2075 4415,1490 4415,25 4315,25 25,25

## Other copper
GND (plane layer: these items are gaps in the copper):
  lines w10: -10,1090 203,1090 341,952 1292,952 1425,819 1425,0 ; 3495,179 3495,555 3590,650 3590,2099
Power (plane layer: these items are gaps in the copper):
  circle w10: c3440,100 r42.43
  circle w10: c3340,100 r43.01
  circle w10: c2113.64,1975 r35.36
  circle w10: c966.79,537 r33.21
  circle w10: c966.56,758 r36.44
  circle w10: c500.03,521.47 r33.21
  lines w10: -5,371 1271,371 1271,717 1271,1036 1379,1036 1379,757 1379,312 1536,155 3295,155 3391,251 3455,315 3455,646 3591,782 3591,916 3591,1255 3625,1289 3625,2002 3718,2095 ; 5,1470 432,1470 432,940 735,637 735,372 ; 540,2100 940,2100 ; 1189,371 1189,0 1591,0 ; 815,259 815,339 895,339 895,259 815,259 ; 1075,259 1155,259 1155,339 1075,339 1075,259

## Silkscreen, mask and mechanical layers (free items; w line width, h text height)
Top Overlay:
  circle w5: c850,2000 r105
  circle w5: c1242,100 r105
  lines w10: 3909,2945 4494,2945
  text "Designed By" at 2869,4586 h75
  text "Mako DSP" at 2176,4557 h135
  text "Adam J. Vadala-Roth" at 2869,4526 h75
  text "Prototype R2.0:JAWS 1" at 2176,4507 h75
  text "www.MakoDSP.com" at 2869,4476 h75
  text "Analog Inputs" at 3904,2965 h78.74
Bottom Overlay:
  region: 2263 vertices and 0 holes, not listed, extent 657.18,88.57 1823,1139.99
  text "r" at 2180,560 h250
Mechanical 15:
  circle w5: c2340,2000 r62.5
  circle w5: c4340,300 r62.5
  lines w5: 0,0 4340,0 4440,0 4440,200 4440,2100 4280,2100 0,2100 0,0
Mechanical 16:
  lines w5: 0,125 ccw(c125,125) 125,0 ; 0,1975 cw(c125,1975) 125,2100

## Text inside footprints (layer, text, board x,y; h text height)
C51: Top Overlay "+" at 1205,279 h59.06 r90
C52: Top Overlay "+" at 945,279 h59.06 r90
"Digital IO Higher Byte1": Top Overlay "SCL" at 2505,1815 h78.74 r90; Top Overlay "SDA" at 2595,1810 h78.74 r90; Top Overlay "AREF" at 2700,1770 h78.74 r90; Top Overlay "GND" at 2805,1805 h78.74 r90; Top Overlay "~ 13" at 2905,1800 h78.74 r90; Top Overlay "12" at 3005,1855 h78.74 r90; Top Overlay "~ 11" at 3100,1795 h78.74 r90; Top Overlay "~ 10" at 3205,1795 h78.74 r90; Top Overlay "~ 9" at 3305,1835 h78.74 r90; Top Overlay "8" at 3405,1890 h78.74 r90
"Digital IO Lower Byte1": Top Overlay "7" at 3565,1895 h78.74 r90; Top Overlay "~ 6" at 3665,1835 h78.74 r90; Top Overlay "~ 5" at 3765,1835 h78.74 r90; Top Overlay "4" at 3865,1890 h78.74 r90; Top Overlay "~ 3" at 3965,1835 h78.74 r90; Top Overlay "2" at 4065,1890 h78.74 r90; Top Overlay "TX 1" at 4160,1790 h78.74 r90; Top Overlay "RX 0" at 4265,1785 h78.74 r90
"Power & Reset1": Top Overlay "IOREF" at 2965,170 h78.74 r90; Top Overlay "RESET" at 3060,170 h78.74 r90; Top Overlay "3.3V" at 3165,170 h78.74 r90; Top Overlay "5V" at 3260,170 h78.74 r90; Top Overlay "GND" at 3360,170 h78.74 r90; Top Overlay "GND" at 3465,170 h78.74 r90; Top Overlay "VIN" at 3565,170 h78.74 r90